# Altium PCB AirBee.PcbDoc
Units mil, origin at the board's own origin, x right, y up, seen from the top; angles counter-clockwise.
Board outline 3470.03 x 1910.03 mil, 2 copper layers (Top Layer, Bottom Layer); 21 components, 25 nets, 115 pads, 1 vias.
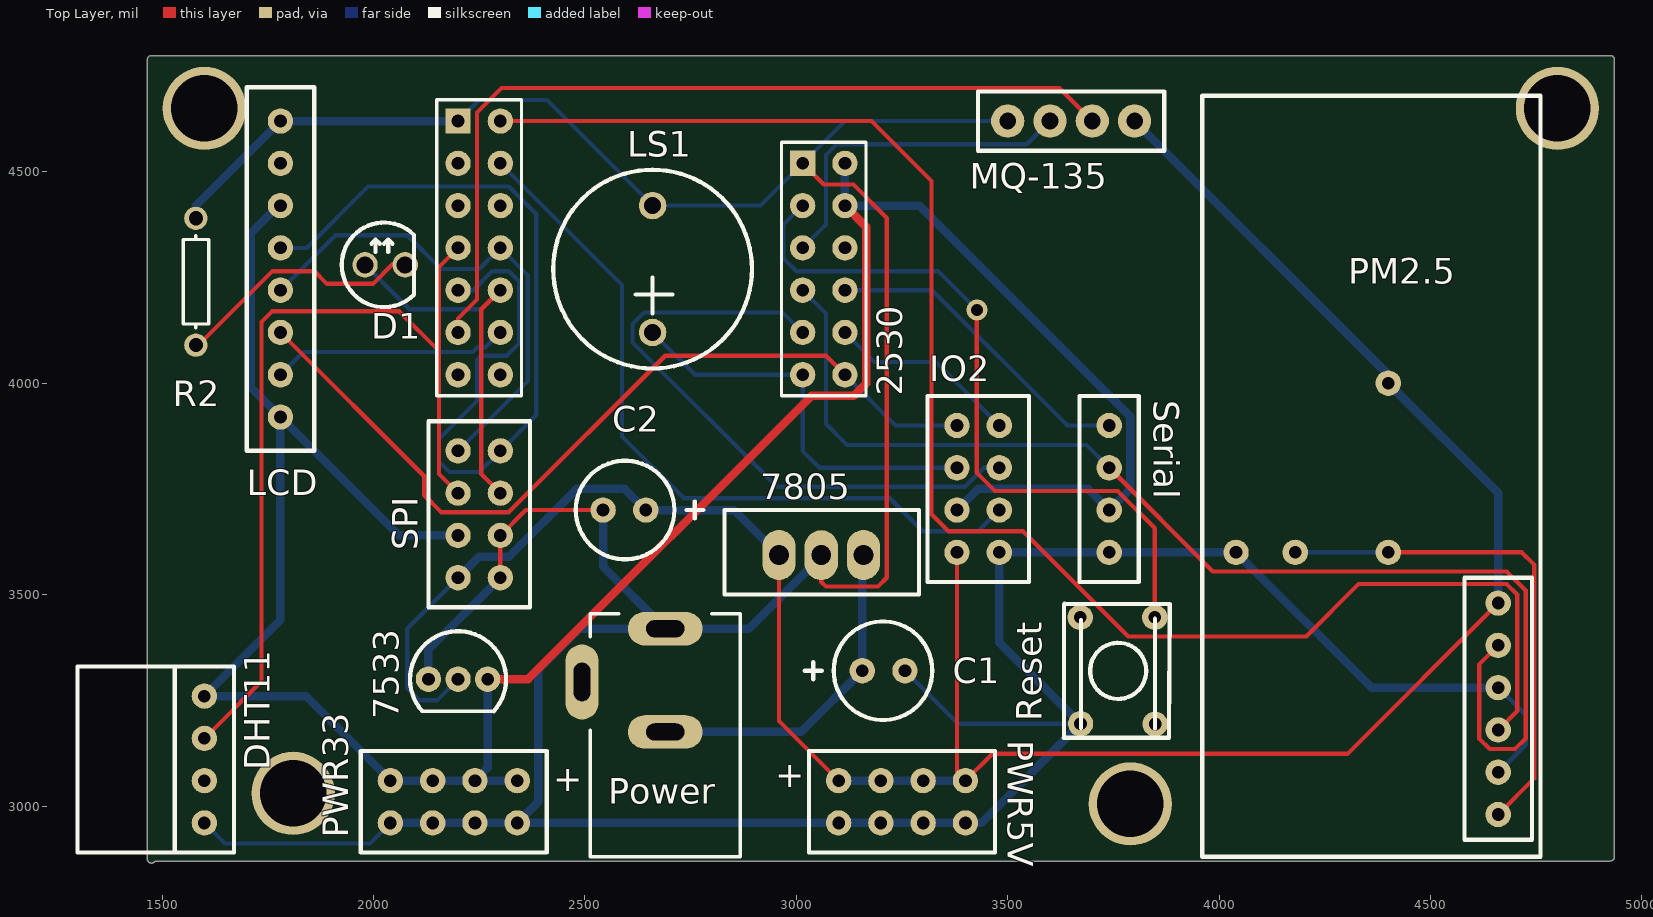
[diagram p0: Top Layer view]
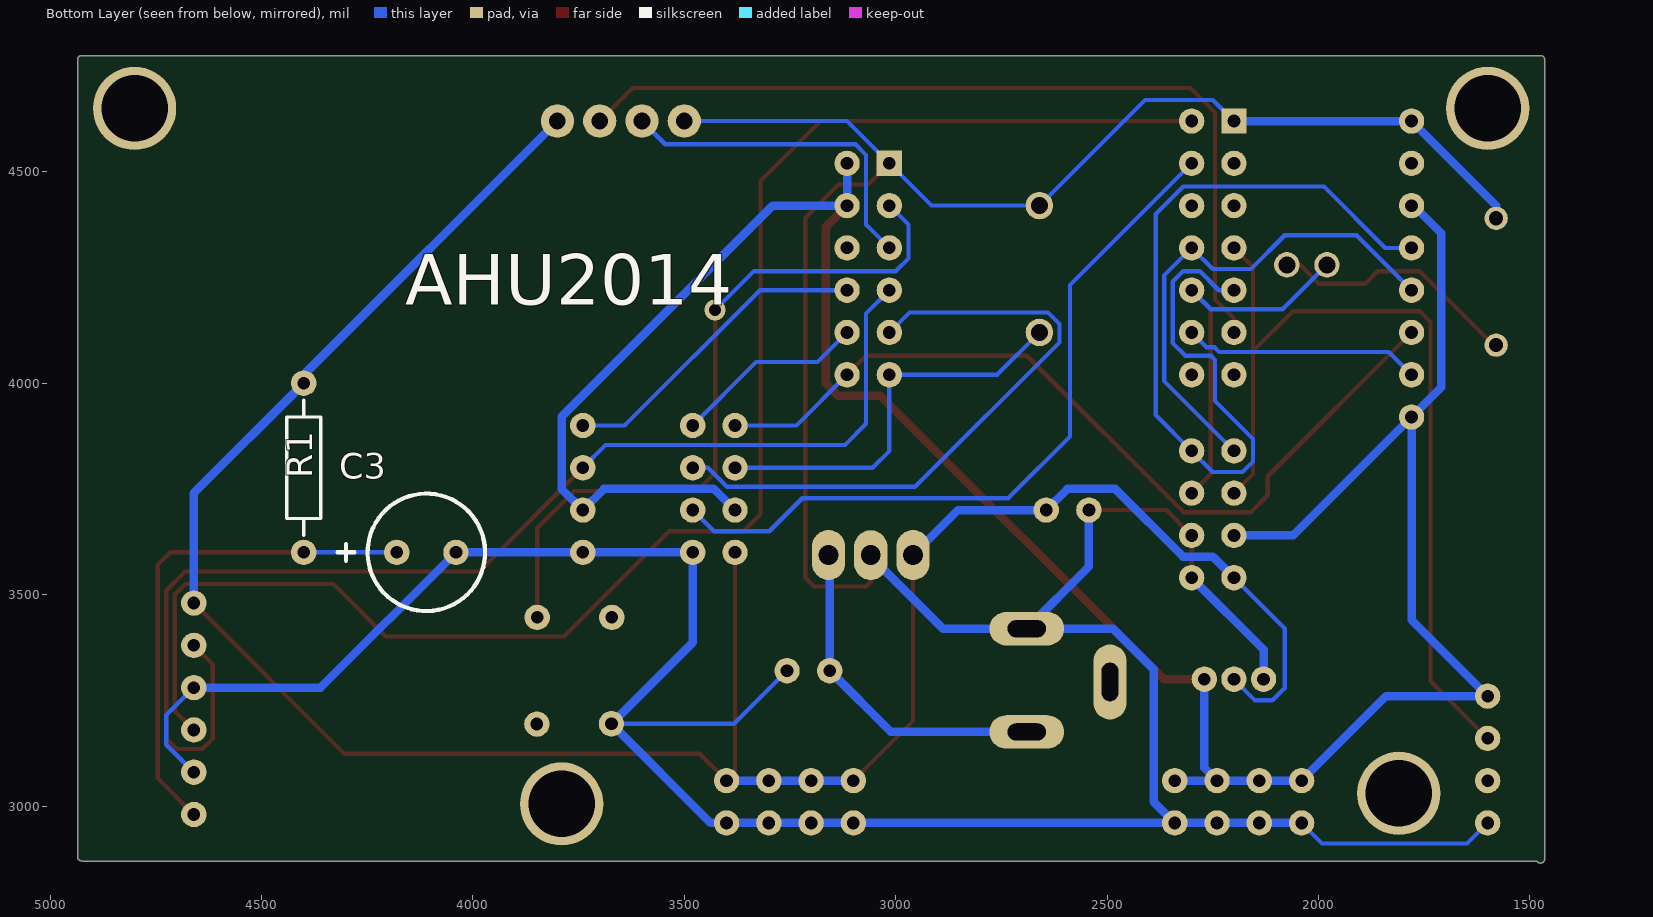
[diagram p1: Bottom Layer view, seen from below]

## Layer stack, top to bottom
Top Layer: signal copper 1.4
Dielectric: dielectric 12.6, FR-4, Dk 4.8
Bottom Layer: signal copper 1.4

## Board outline
1464.98,2875 1464.98,4765 cw(c1475,4765) 1475,4775.02 4925,4775.02 cw(c4925,4765) 4935.02,4765 4935.02,2880 cw(c4925,2880) 4925,2869.99 1483.67,2869.99 cw(c1475,2875)

## Design rules (kind name [scope] priority, off if disabled: settings)
Clearance [All] p1: gap=10
PolygonConnect [All] p1: connectstyle=Relief reliefconductorwidth=10 reliefentries=4 polygonreliefangle="90 Angle"
RoutingVias [All] p1: holewidth=28 width=50 viastyle="Through Hole" minholewidth=28 minwidth=50 maxholewidth=28 maxwidth=50
SilkscreenOverComponentPads [All] p1: minsilkscreentomaskgap=10
SolderMaskExpansion [All] p1: expansion=4
TestPointUsage [All] p1: valid=0 allowmultiple=FALSE
Testpoint [All] p1: side=15 testpointundercomponent=TRUE minsize=40 maxsize=100 preferedsize=60 minholesize=0 maxholesize=40 preferedholesize=32 testpointgrid=1 style=1023 order=0123456789
Width VCC_3 [InNet('VCC3')] p1: maxlimit=20 minlimit=20 preferedwidth=20
Width [All] p2: maxlimit=20 minlimit=10 preferedwidth=10 minimp=50.000000 maximp=50.000000 favimp=50.000000
Width GND [InNet('GND')] p3: maxlimit=20 minlimit=20 preferedwidth=20
Width VCC_5 [InNet('VCC5')] p4: maxlimit=20 minlimit=20 preferedwidth=20
23 further rules are at their usual default settings.

## Components (designator, comment, footprint, x,y, rotation, side; value= is the part's Value field where it differs from the comment)
2530 "CC2530_Core" CC2530_Core 2200,4620 r270 top
7533 "HT7533-1" PNP 2200,3300 r270 top
7805 "LM7805" 7805 3060,3600 r0 top
C1 "0.33uF" CAP-10uF 3160,3320 r0 top
C2 "0.1uF" CAP-10uF 2640,3700 r180 top
C3 "220uF" CAP-100uF 4180,3600 r180 bottom
D1 "LED" LED 1980,4280 r0 top
DHT11 "DHT11" DHT11 1600,3260 r270 top
IO2 "Doubleheader_IO" header16 3480,3600 r90 top
LCD "HEAder8" header8 1780,3920 r90 top
LS1 "Buzzer" 5V-BUZZER 2660,4120 r90 top
MQ-135 "MQ_135" MQ_135 3500,4620 r0 top
PM2.5 "PM2_5" PM2.5 4660,2980 r90 top
Power "Power" dianyuan 2680,3280 r90 top
PWR5V "Doubleheader" header16 3400,3060 r180 top
PWR33 "Doubleheader" header16 2340,3060 r180 top
R1 "Res2" AXIAL-0.4 4400,3800 r270 bottom
R2 "Res" AXIAL-0.3 1580,4240 r270 top
Reset "Switch" 微动开关 3760,3320 r270 top
Serial "Serial" HEADER4 3740,3900 r270 top
SPI "Doubleheader_SPI" header16 2300,3540 r90 top

## Footprints (in the part's own frame and the unit in brackets; to place one, negate y for a bottom-side part, rotate by r counter-clockwise, add the part's x,y. Pads: shape width x height; smd on the part's side, far side on the other; paste and mask are expansions set on the pad)
5V-BUZZER [mil]
  round 65 hole 40: 1(0,0) 2(300,0)
  silkscreen extent -85,-235 385,235
7805 [mm]
  oval 2x3 hole 1.2: 1(2.51,-0.159) 2(-0.026,-0.165) 3(-2.57,-0.159)
  silkscreen extent -5.84,-2.54 5.84,2.54
AXIAL-0.3 [mm] "Resistor; 2 Leads"
  round 1.4 hole 0.85: 1(-3.81,0) 2(3.81,0)
  silkscreen extent -2.77,-0.76 2.77,0.76
AXIAL-0.4 [mil] "Resistor; 2 Leads"
  round 60 hole 30: 1(-200,0) 2(200,0)
  silkscreen extent -160,-40 160,40
CAP-10uF [mil]
  round 60 hole 30: 1(-4,0) 2(97,0)
  silkscreen extent -140,-116 162,116
CAP-100uF [mil]
  round 60 hole 30: 1(0,0) 2(140,0)
  silkscreen extent -140,-139 209,139
CC2530_Core [mil] "Connector; Header; 7x2 Position"
  rect 60x60 hole 30: 0(0,0) 14(100,815)
  round 60 hole 30: 1(0,100) 2(100,0) 3(100,100) 4(200,0) 5(200,100) 6(300,0) 7(300,100) 8(400,0) 9(400,100) 10(500,0) 11(500,100) 12(600,0) 13(600,100) 15(100,915) 16(200,815) 17(200,915) 18(300,815) 19(300,915) 20(400,815) 21(400,915) 22(500,815) 23(500,915) 24(600,815) 25(600,915)
  silkscreen extent -50,-50 650,965
DHT11 [mil]
  round 60 hole 30: 1(0,0) 2(100,0) 3(200,0) 4(300,0)
  silkscreen extent -70,-300 370,70
dianyuan [mil]
  oval 79x177.1 hole 40 slot 90.55 at 90 deg: 1(139.37,-10)
  oval 79x177 hole 40 slot 90.55 at 90 deg: 2(-104.72,-10)
  oval 177x79 hole 39.37 slot 90.55 at 0 deg: 3(13.39,186.85)
  silkscreen extent -400,-187 175,167
HEADER4 [mil]
  round 60 hole 30: 1(0,0) 2(100,0) 3(200,0) 4(300,0)
  silkscreen extent -70,-70 370,70
header8 [mil]
  round 60 hole 30: 1(0,0) 2(100,0) 3(200,0) 4(300,0) 5(400,0) 6(500,0) 7(600,0) 8(700,0)
  silkscreen extent -80,-80 780,80
header16 [mil]
  round 60 hole 30: 1(0,0) 2(100,0) 3(200,0) 4(300,0) 5(300,100) 6(200,100) 7(100,100) 8(0,100)
  silkscreen extent -70,-70 370,170
LED [mil]
  round 60 hole 40: 1(0,0) 2(95,0)
  silkscreen extent -55,-100 116,100
MQ_135 [mm]
  round 2 hole 1: 1(0,0) 2(2.54,0) 3(5.08,0) 4(7.62,0)
  silkscreen extent -1.78,-1.78 9.4,1.78
PM2.5 [mil]
  round 60 hole 30: 1(0,0) 2(100,0) 3(200,0) 4(300,0) 5(400,0) 6(500,0)
  silkscreen extent -100,-100 1700,700
PNP [mil]
  round 60 hole 30: 1(0,70) 2(0,0) 3(0,-70)
  silkscreen extent -113,-114 76,113
微动开关 [mil]
  round 60 hole 30: 1(-126.18,87.8) 2(125.4,-87.79) 3(126.18,88.58) 4(-126.18,-88.58)
  Top Layer lines w15: -127.44,85.26 -125.54,87.16 ; -127.44,85.26 -125.54,87.16 ; -127.44,85.26 -125.54,87.16 ; -127.44,85.26 -125.54,87.16 ; -127.44,85.26 -125.54,87.16 ; -127.44,85.26 -125.54,87.16 ; -127.44,85.26 -125.54,87.16 ; -127.44,85.26 -125.54,87.16 ; -127.44,85.26 -125.54,87.16 ; -127.44,85.26 -125.54,87.16 ; -127.44,85.26 -125.54,87.16 ; -127.44,85.26 -125.54,87.16 ; -127.44,85.26 -125.54,87.16 ; -127.44,85.26 -125.54,87.16 ; -127.44,85.26 -125.54,87.16 ; -127.44,85.26 -125.54,87.16 ; -127.44,85.26 -125.54,87.16 ; -124.44,98.26 -126.18,98.26 ; -124.44,98.26 -126.18,98.26 ; -124.44,98.26 -126.18,98.26 ; -124.44,98.26 -126.18,98.26 ; -124.44,98.26 -126.18,98.26 ; -124.44,98.26 -126.18,98.26 ; -124.44,98.26 -126.18,98.26 ; -124.44,98.26 -126.18,98.26 ; -124.44,98.26 -126.18,98.26 ; -124.44,98.26 -126.18,98.26 ; -124.44,98.26 -126.18,98.26 ; -124.44,98.26 -126.18,98.26 ; -124.44,98.26 -126.18,98.26 ; -124.44,98.26 -126.18,98.26 ; -124.44,98.26 -126.18,98.26 ; -124.44,98.26 -126.18,98.26 ; -126.18,98.26 -140.44,98.26 ; -126.18,98.26 -140.44,98.26 ; -126.18,98.26 -140.44,98.26 ; -126.18,98.26 -140.44,98.26 ; -126.18,98.26 -140.44,98.26 ; -126.18,98.26 -140.44,98.26 ; -126.18,98.26 -140.44,98.26 ; -126.18,98.26 -140.44,98.26 ; -126.18,98.26 -140.44,98.26 ; -126.18,98.26 -140.44,98.26 ; -126.18,98.26 -140.44,98.26 ; -126.18,98.26 -140.44,98.26 ; -126.18,98.26 -140.44,98.26 ; -126.18,98.26 -140.44,98.26 ; -126.18,98.26 -140.44,98.26 ; -126.18,98.26 -140.44,98.26
  silkscreen extent -158,-127 159,123

## Part data
C1 C2 C3: library part cap
D1: library part LED0, "Typical INFRARED GaAs LED"
LS1: "Magnetic Transducer Buzzer"
R1: "Resistor"
R2: library part Res1, "Resistor"

## Free pads (board coordinates)
  round 196.85 hole 157.48: 0(1600,4650) 0(1810,3030) 0(3790,3005) 0(4800,4650)

## Via types
v1: diameter 50, hole 28, Top Layer to Bottom Layer, 1 vias

## Nets (pads, with @x,y where several pads share a name; then routed paths per layer and width w, separated by ;. In a path a pad name is that pad's centre, name@x,y a point inside that pad or via, vN(x,y) a via of type N, cw(c..) or ccw(c..) an arc to the next point about the centre after c; other vN are vias at no path point)
CSN: 2530.9 D1.1 SPI.3 | length 899.4
  Top Layer w10: SPI.3 2255,3785 2255,4175 2530.9
  Bottom Layer w10: D1.1 2085,4175 2255,4175 2530.9
DHT11_D: 2530.6 DHT11.2 SPI.6 | length 2418.5
  Top Layer w10: DHT11.2 1735,3295 1735,4145 1760,4170 2061,4170 2155,4076 ; SPI.6 2155,3785 ; 2530.6 2155,4275 2155,4076 ; 2155,3785 2155,4076 ; 2155,3785 2155,4076
GND: 2530.0 2530.14 7533.3 7805.2 C1.2 C2.2 C3.2 DHT11.4 IO2.1 LCD.8 LS1.2 MQ-135.1 PM2.5.2 PM2.5.4 Power.1 PWR5V.5 PWR5V.6 PWR5V.7 PWR5V.8 PWR33.5 PWR33.6 PWR33.7 PWR33.8 R2.1 Reset.2 Serial.4 SPI.1 SPI.2 | length 10489.9
  Top Layer w10: SPI.1 SPI.2 2360,3700 C2.2 ; 2530.14 3065,4470 3135,4470 3214,4391 3214,3540 3193,3519 3069.98,3519 3058.98,3530 7805.2
  Bottom Layer w10: DHT11.4 1648.43,2911.57 1991.57,2911.57 PWR33.5 ; 2530.0 2250,4670 2410,4670 LS1.2 2915,4420 2530.14 3115,4620 MQ-135.1 ; 7805.2@3058.98,3590.25 7805.2 ; C1.2 3382.4,3194.6 Reset.2 ; PM2.5.2 4725,3145 4725,3215 PM2.5.4
  Bottom Layer w20: R2.1 1580,4420 LCD.8 2530.0 ; PWR33.5 PWR33.6 PWR33.7 PWR33.8 ; 7533.3 2130,3370 SPI.1 ; C2.2 2543,3566.37 Power.1 ; 7805.2@3058.98,3590.25 2888.09,3419.37 Power.1 ; PM2.5.4 4360,3280 C3.2 Serial.4 IO2.1 3480,3386.81 Reset.2 3437.6,2960 PWR5V.8 PWR5V.7 PWR5V.6 PWR5V.5 PWR33.8 ; PWR33.8 2390,3010 2390,3323.38 2485.99,3419.37 Power.1
MOSI: 2530.7 LCD.4 SPI.5 | length 1203
  Bottom Layer w10: LCD.4 1910,4350 2080,4350 2160,4270 2250,4270 2530.7 2365,4255 2365,4005 SPI.5
MQ135_A: 2530.18 MQ-135.2 | length 805.9
  Bottom Layer w10: 2530.18 3070,4375 3070,4540 3095,4565 3545,4565 MQ-135.2
MQ135_D: 2530.10 MQ-135.3 | length 2050
  Top Layer w10: 2530.10 2200,4153 2245,4198 2245,4640 2303,4698 3622,4698 MQ-135.3
Net2530_16: 2530.16 Reset.1 | length 1732.6
  Top Layer w10: v1(3427,4173) 3427,3788 3470,3745 3760,3745 3847.8,3657.2 Reset.1 Reset.1@3858.26,3446.18
  Bottom Layer w10: 2530.16 2970,4375 2970,4295 3000,4265 3335,4265 v1(3427,4173)
NetC3_1: C3.1 PM2.5.1 R1.2 | length 1203.1
  Top Layer w10: R1.2 4715.84,3600 4745,3570.84 4745,3065 PM2.5.1
  Bottom Layer w10: C3.1 R1.2
NetD1_2: D1.2 R2.2 | length 598.6
  Top Layer w10: R2.2 1586.36,4090 1761.36,4265 1860,4265 1890,4235 1998.64,4235 2043.64,4280 D1.2
OP0_4: 2530.22 IO2.3 | length 1504.7
  Bottom Layer w10: 2530.22 2967.5,4167.5 2640,4167.5 2612.5,4140 2612.5,4096.5 2954,3755 3398.64,3755 3443.64,3800 IO2.3
OP0_5: 2530.23 IO2.4 | length 456.1
  Bottom Layer w10: 2530.23 3185,4050 3330,4050 IO2.4
OP0_6: 2530.24 IO2.6 LS1.1 | length 958
  Bottom Layer w10: LS1.1 2760,4020 2530.24 3015,3840 3055,3800 IO2.6
OP0_7: 2530.25 IO2.5 LCD.3 | length 2024
  Top Layer w10: LCD.3 2120,3780 2120,3735 2160,3695 2320,3695 2690,4065 3070,4065 2530.25
  Bottom Layer w10: 2530.25 3235,3900 IO2.5
OP1_0: 2530.13
OP1_1: 2530.12
OP1_2: 2530.11 LCD.2 | length 561.4
  Bottom Layer w10: LCD.2 1833.84,4073.84 2235,4073.84 2246.16,4085 2265,4085 2530.11
OP1_5: 2530.8 LCD.5 SPI.4 | length 2176.1
  Bottom Layer w10: LCD.5 1842,4320 1987,4465 2320,4465 2385,4400 2385,3925 SPI.4 2250,3790 2180,3790 2155,3815 2155,3868 2245,3958 2245,4055 2255,4065 2315,4065 2345,4095 2345,4240 2320,4265 2281,4265 2236,4220 2530.8
OP2_2: 2530.3 IO2.2 | length 1770.8
  Bottom Layer w10: 2530.3 2588,4232 2588,3874 2734,3728 3221,3728 3299,3650 3430,3650 IO2.2
OP2_3: 2530.4
PM2.5_I: 2530.1 PM2.5.3 | length 3771.9
  Top Layer w10: 2530.1 3178,4620 3320,4478 3320,3690 3360,3650 3536,3650 3785,3401 4206,3401 4330,3525 4680,3525 4705,3500 4705,3225 PM2.5.3
PM2.5_O: 2530.20 PM2.5.5 Serial.2 | length 2876.3
  Top Layer w10: Serial.2 3985,3555 4680,3555 4725,3510 4725,3160 4700,3135 4640,3135 4615,3160 4615,3335 PM2.5.5
  Bottom Layer w10: 2530.20 3070,4165 3070,3904 3120,3854 3686,3854 Serial.2
UART0_TX: 2530.21 Serial.1 | length 757.5
  Bottom Layer w10: 2530.21 3321,4220 3641,3900 Serial.1
VCC3: 2530.15 2530.17 7533.1 DHT11.1 IO2.7 LCD.1 LCD.6 PWR33.1 PWR33.2 PWR33.3 PWR33.4 Serial.3 SPI.7 | length 6157.5
  Top Layer w20: 7533.1 2365.71,3300 3035.71,3970 3135.71,3970 3165,3999.29 3165,4370 2530.17
  Bottom Layer w20: LCD.6 1775,4420 1710,4355 1710,3990 LCD.1 ; SPI.7 2060,3640 LCD.1 ; 7533.1 2270,3090 PWR33.2 ; PWR33.1 PWR33.2 ; 2530.15 2530.17 3290.71,4420 3790,3920.71 3790,3750 Serial.3 3690,3750 3430,3750 IO2.7 ; LCD.1 1780,3440 DHT11.1 1840,3260 PWR33.4 PWR33.3 PWR33.2
VCC5: 7533.2 7805.3 C2.1 IO2.8 MQ-135.4 PM2.5.6 PWR5V.1 PWR5V.2 PWR5V.3 PWR5V.4 R1.1 SPI.8 | length 5744.5
  Top Layer w10: 7805.3 2958.83,3201.17 PWR5V.4 ; IO2.8 3380,3080 PWR5V.1 3463.43,3123.43 4303.43,3123.43 PM2.5.6
  Bottom Layer w10: 7533.2 2150,3250 2109.29,3250 2080,3279.29 2080,3420 SPI.8
  Bottom Layer w20: SPI.8 2250,3590 2320.71,3590 2480.71,3750 2594,3750 C2.1 2852.59,3700 7805.3 ; PWR5V.4 PWR5V.3 PWR5V.2 PWR5V.1 ; MQ-135.4 4400,4020 R1.1 4660,3740 PM2.5.6
VIN: 7805.1 C1.1 Power.2 | length 800.9
  Bottom Layer w20: Power.2 3011.28,3175.28 C1.1 3156,3590.92 7805.1
pads on no net: 2530.2 2530.5 2530.19 DHT11.3 LCD.7 Power.3 Reset.3 Reset.4

## Silkscreen, mask and mechanical layers (free items; w line width, h text height)
Top Overlay:
  text "+" at 2950,3045 h60
  text "+" at 2425,3035 h60
Bottom Overlay:
  text "AHU2014" at 4160,4185 h120